# Altium PCB DBS3100霍尔_V0.5.PCBDOC
Units mil, origin at the board's own origin, x right, y up, seen from the top; angles counter-clockwise.
Board outline 6461.73 x 2160.54 mil, 2 copper layers (TOP, BOTTOM), stack 13.811 mil thick; 9 components, 4 nets, 22 pads, 8 vias.
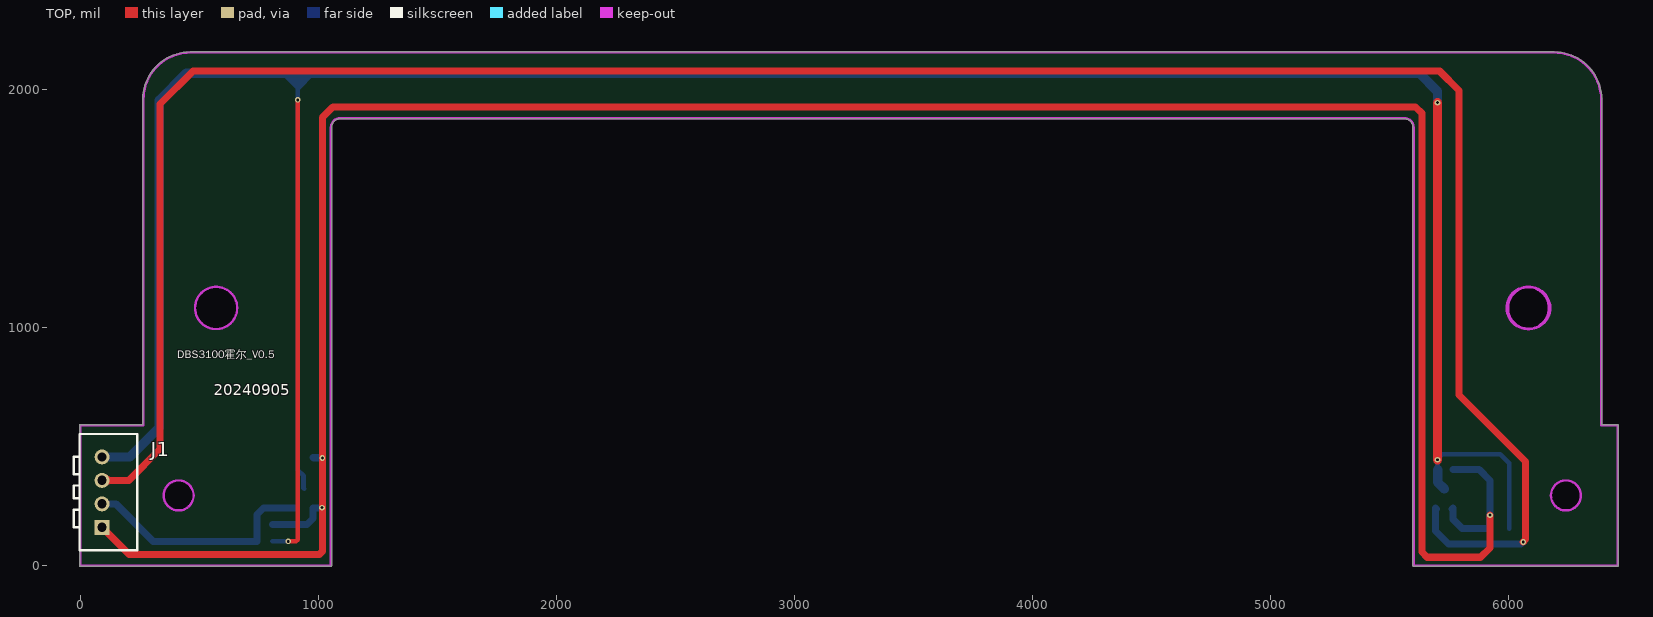
[diagram p0: TOP view]
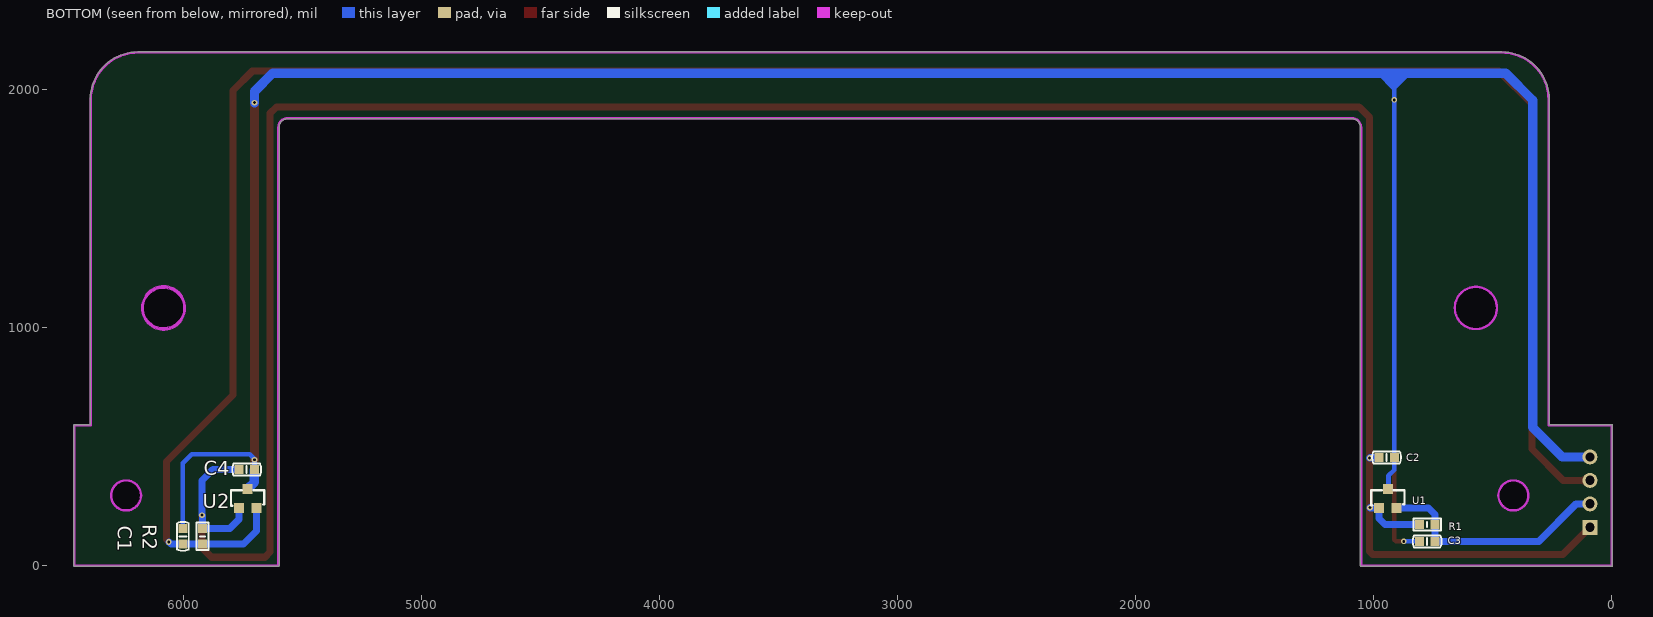
[diagram p1: BOTTOM view, seen from below]

## Layer stack, top to bottom
Top Solder: solder mask 0.4, Solder Resist, Dk 3.5
TOP: signal copper 1
Dielectric1: core 11.811, FR-4, Dk 3.8
BOTTOM: signal copper 1
Bottom Solder: solder mask 0.4, Solder Resist, Dk 3.5

## Board outline
-2.51,0 ccw(c0,0) 0,-2.51 1053.15,-2.51 ccw(c1053.15,0) 1055.67,0 1055.67,1840.55 cw(c1092.52,1840.55) 1092.52,1877.41 5561.03,1877.41 cw(c5561.03,1840.55) 5597.88,1840.55 5597.88,0 ccw(c5600.4,0) 5600.4,-2.51 6456.7,-2.51 ccw(c6456.7,0) 6459.21,0 6459.21,590.55 ccw(c6456.7,590.55) 6456.7,593.07 6390.31,593.07 6390.31,1958.66 ccw(c6190.95,1958.66) 6190.95,2158.03 462.6,2158.03 ccw(c462.6,1958.66) 263.23,1958.66 263.23,593.07 0,593.07 ccw(c0,590.55) -2.51,590.55
cut-out: 350.39,295.28 ccw(c413.39,295.28) 413.39,232.28 ccw(c413.39,295.28) 476.38,295.28 ccw(c413.39,295.28) 413.39,358.27 ccw(c413.39,295.28)
cut-out: 482.28,1082.68 ccw(c570.87,1082.68) 570.87,994.09 ccw(c570.87,1082.68) 659.45,1082.68 ccw(c570.87,1082.68) 570.87,1171.26 ccw(c570.87,1082.68)
cut-out: 5994.09,1082.68 ccw(c6082.68,1082.68) 6082.68,994.09 ccw(c6082.68,1082.68) 6171.26,1082.68 ccw(c6082.68,1082.68) 6082.68,1171.26 ccw(c6082.68,1082.68)
cut-out: 6068.08,990.22 cw(c6068.86,995.18) 6069.64,1000.13 ccw(c6082.68,1082.68) 6166.25,1082.68 ccw(c6082.68,1082.68) 6066.29,1000.73 cw(c6065.3,995.81) 6070.32,995.81 cw(c6065.3,995.81) 6064.32,990.9 cw(c6082.68,1082.68) 6176.28,1082.68 cw(c6082.68,1082.68)
cut-out: 6068.08,990.22 cw(c6068.86,995.18) 6069.64,1000.13 ccw(c6082.68,1082.68) 6166.25,1082.68 ccw(c6082.68,1082.68) 6066.29,1000.73 cw(c6065.3,995.81) 6070.32,995.81 cw(c6065.3,995.81) 6064.32,990.9 cw(c6082.68,1082.68) 6176.28,1082.68 cw(c6082.68,1082.68)
cut-out: 6177.17,295.28 ccw(c6240.16,295.28) 6240.16,232.28 ccw(c6240.16,295.28) 6303.15,295.28 ccw(c6240.16,295.28) 6240.16,358.27 ccw(c6240.16,295.28)

## Design rules (kind name [scope] priority, off if disabled: settings)
Clearance Clearance_3 [InComponent('U6')] p1: gap=7 ignorepadtopadclearanceinfootprint=FALSE except(0: Arc-Hole Track-Hole SMDPad-Hole THPad-Hole Via-Hole Fill-Hole Poly-Hole Region-Hole Text-Hole)
Clearance Clearance_2 [InComponent('J1') vs OnLayer('Keep-Out Layer')] p2: gap=0 ignorepadtopadclearanceinfootprint=FALSE
Clearance [(InPoly)] p3: gap=30 ignorepadtopadclearanceinfootprint=FALSE except(0: Arc-Hole Track-Hole SMDPad-Hole THPad-Hole Via-Hole Fill-Hole Poly-Hole Region-Hole Text-Hole)
Clearance Clearance_1 [All] p4: gap=6 ignorepadtopadclearanceinfootprint=FALSE except(0: Arc-Hole Track-Hole SMDPad-Hole THPad-Hole Via-Hole Fill-Hole Poly-Hole Region-Hole Text-Hole)
FabricationTestPointUsage TestPointUsage [All] p1: valid=0 allowmultiple=FALSE
FabricationTestpoint Testpoint [All] p1: side=3 testpointundercomponent=TRUE minsize=40 maxsize=100 preferedsize=60 minholesize=20 maxholesize=40 preferedholesize=32 testpointgrid=1 allowsidetop=TRUE allowsidebottom=TRUE usegrid=TRUE gridtolerance=0.01
HoleSize [All] p1: absolutevalues=TRUE maxlimit=1000 minlimit=1 maxpercent=80.000 minpercent=20.000
MinimumSolderMaskSliver [All] p1 off: minsoldermaskwidth=10
PlaneConnect [All] p1: planeconnectstyle=Relief reliefexpansion=20 reliefentries=4 reliefconductorwidth=20 reliefairgap=10
PolygonConnect PolygonConnect_1 [InNet('EXT_GND')] p1: connectstyle=Direct reliefconductorwidth=10 reliefentries=4 polygonreliefangle="90 Angle" airgapwidth=10
PolygonConnect VIA [ViaSize] p2: connectstyle=Direct reliefconductorwidth=10 reliefentries=4 polygonreliefangle="90 Angle" airgapwidth=10
PolygonConnect [All] p3: connectstyle=Direct reliefconductorwidth=20 reliefentries=4 polygonreliefangle="90 Angle" airgapwidth=10
RoutingVias [All] p1: holewidth=16 width=30 viastyle="Through Hole" minholewidth=12 minwidth=24 maxholewidth=100 maxwidth=500
SilkToSilkClearance [All] p1 off: silktosilkclearance=10
SilkToSolderMaskClearance SilkscreenOverComponentPads [IsPad] p1 off: minsilkscreentomaskgap=10 clearancetoexposedcopper=TRUE
SolderMaskExpansion [All] p1 off: expansion=4
Width Width_GND [InNet('GND')] p1: maxlimit=100 minlimit=1 preferedwidth=20 minimp=50.000000 maximp=50.000000 favimp=50.000000
Width Width_POWER [InNet('+3.3V') and InNet('VCC')] p2: maxlimit=100 minlimit=10 preferedwidth=20
Width [All] p3: maxlimit=400 minlimit=1 preferedwidth=10
23 further rules are at their usual default settings.

## Components (designator, comment, footprint, x,y, rotation, side; value= is the part's Value field where it differs from the comment)
C1 "100pF" C0603 6001.8,123.33 r0 bottom
C2 "0.1uF" C0603 946.17,454.89 r90 bottom
C3 "100pF" C0603 775.59,102.36 r270 bottom
C4 "0.1uF" C0603 5733.57,403.71 r90 bottom
J1 "CON4" HX25035-4A 91.84,309.22 r90 top
R1 "10K" R0603 775.59,173.23 r270 bottom
R2 "10K" R0603 5919.12,123.33 r0 bottom
U1 "MH253ESO" SOT-23-253 940.94,242.83 r180 bottom
U2 "MH253ESO" SOT-23-253 5729.63,242.29 r180 bottom

## Footprints (in the part's own frame and the unit in brackets; to place one, negate y for a bottom-side part, rotate by r counter-clockwise, add the part's x,y. Pads: shape width x height; smd on the part's side, far side on the other; paste and mask are expansions set on the pad)
C0603 [mil]
  rect 38x38 smd: 1(0,32.5) 2(0,-32.5)
  silkscreen extent -25,-61 25,61
HX25035-4A [mm]
  rect 1.6x1.6 hole 1: 1(-3.75,0)
  round 1.6 hole 1: 2(-1.25,0) 3(1.25,0) 4(3.75,0)
  silkscreen extent -6.2,-3.75 6.2,3
R0603 [mil]
  rect 38x38 smd: 1(0,32.5) 2(0,-32.5)
  silkscreen extent -25,-58 25,58
SOT-23-253 [mil]
  rect 42x42 smd: 1(-37,0) 2(37,0) 3(0,80)
  silkscreen extent -70,10 70,75

## Part data
C1 C2 C3 C4: library part CAP
R1 R2: library part R

## Via types
v1: diameter 24, hole 12, TOP to BOTTOM, 8 vias

## Nets (pads, with @x,y where several pads share a name; then routed paths per layer and width w, separated by ;. In a path a pad name is that pad's centre, name@x,y a point inside that pad or via, vN(x,y) a via of type N, cw(c..) or ccw(c..) an arc to the next point about the centre after c; other vN are vias at no path point)
EXT_GND: C1.2 C2.2 C3.2 C4.2 J1.4 U1.3 U2.3 | length 13083.7
  TOP w19.68: v1(874.02,102.36) 906.07,102.36 913.67,109.96 913.67,1903.67 v1(913.67,1956.69)
  TOP w39.37: v1(5700.79,444.88) v1(5700.79,1944.88)
  BOTTOM w19.68: C3.2 v1(874.02,102.36) ; 913.67,2031.22 v1(913.67,1956.69) C2.2 913.67,402.04 938.29,377.41 938.29,325.49 U1.3 ; C4.2 5701.07,448.82 5720.75,468.5 5964.57,468.5 6001.8,431.27 C1.2
  BOTTOM w39.37: J1.4 207.98,456.86 331.99,580.88 331.99,1954.89 446.17,2069.07 898.92,2069.07 ; 905.79,2062.2 898.92,2069.07 ; v1(5700.79,1944.88) 5700.79,1992.13 5623.85,2069.07 898.92,2069.07 ; C4.2 5701.07,350.86 U2.3
HA2: C1.1 J1.3 R2.1 U2.2 | length 9870.7
  TOP w29.53: J1.3 204.04,358.44 335.93,490.33 335.93,1939.15 473.72,2076.94 5710.46,2076.94 5791.34,1996.06 5791.34,716.54 6070.87,437.01 6070.87,109.72 v1(6060.85,99.71) ; J1.3@103.67,346.61 cw(c132.23,318.04) 132.23,358.44 cw(c132.23,398.83) J1.3@103.67,370.27
  BOTTOM w29.53: U2.2@5697.13,237.79 U2.2 5692.63,145.95 5747.75,90.83 C1.1 6051.98,90.83 v1(6060.85,99.71)
NetC3_1: C3.1 J1.2 R1.1 U1.2 | length 1001.9
  BOTTOM w30: J1.2 149.44,260.01 307.09,102.36 C3.1 R1.1 743.09,215.53 770.39,242.83 U1.2
VDD33: C2.1 C4.1 J1.1 R1.2 R2.2 U1.1 U2.1 | length 10682.3
  TOP w30: J1.1 206.18,47.24 1003.94,47.24 1017.03,60.34 v1(1017.03,452.76) 1017.03,1883.17 1061.19,1927.33 5608.1,1927.33 5635.14,1900.29 5635.14,57.26 5656.96,35.43 5881.89,35.43 5921.09,74.63 v1(5921.09,212.6)
  BOTTOM w30: R1.2 952.76,173.23 977.94,198.42 U1.1 1014.49,242.83 v1(1015.75,244.09) ; U2.1@5762.13,237.79 U2.1 5766.63,194 5804.8,155.83 R2.2 5919.12,210.63 v1(5921.09,212.6) 5921.09,358.44 5875.82,403.71 C4.1 ; C2.1 1014.89,454.89 v1(1017.03,452.76) 980.8,452.76 C2.1

## Keep-outs
Keep-Out Layer:
  circle w10: c6082.68,1082.68 r88.58
  circle w10: c570.87,1082.68 r88.58
  circle w10: c6240.16,295.28 r62.99
  circle w10: c413.39,295.28 r62.99
  lines w10: 0,551.74 0,590.55 265.75,590.55 265.75,1958.66 cw(c462.6,1958.66) 462.6,2155.51 6190.95,2155.51 cw(c6190.95,1958.66) 6387.8,1958.66 6387.8,590.55 6456.7,590.55 6456.7,0 5600.4,0 5600.4,1840.55 ccw(c5561.03,1840.55) 5561.03,1879.92 1092.52,1879.92 ccw(c1092.52,1840.55) 1053.15,1840.55 1053.15,0 0,0 0,588.75

## Other copper
BOTTOM:
  region net EXT_GND: 842.52,2066.65 913.39,1995.78 917.32,1995.78 988.19,2066.65

## Silkscreen, mask and mechanical layers (free items; w line width, h text height)
Top Overlay:
  text "DBS3100霍尔_V0.5" at 407.18,858.27 h59.06
  text "20240905" at 560.34,698.99 h78.74
Mechanical 1:
  circle w10: c6082.68,1082.68 r88.58
  circle w10: c6240.16,295.28 r62.99
  circle w10: c570.87,1082.68 r88.58
  circle w10: c413.39,295.28 r62.99
  lines w10: 0,551.74 0,590.55 265.75,590.55 265.75,1958.66 cw(c462.6,1958.66) 462.6,2155.51 6190.95,2155.51 cw(c6190.95,1958.66) 6387.8,1958.66 6387.8,590.55 6456.7,590.55 6456.7,0 5600.4,0 5600.4,1840.55 ccw(c5561.03,1840.55) 5561.03,1879.92 1092.52,1879.92 ccw(c1092.52,1840.55) 1053.15,1840.55 1053.15,0 0,0 0,588.75